# Altium PCB 信号采集板.PcbDoc (part 1 of 4)
Units mil, origin at the board's own origin, x right, y up, seen from the top; angles counter-clockwise.
Board outline 5905.51 x 1775.59 mil, 2 copper layers (Top Layer, Bottom Layer); 203 components, 126 nets, 643 pads, 227 vias.
Unrouted connection lines stored in the file: 2.
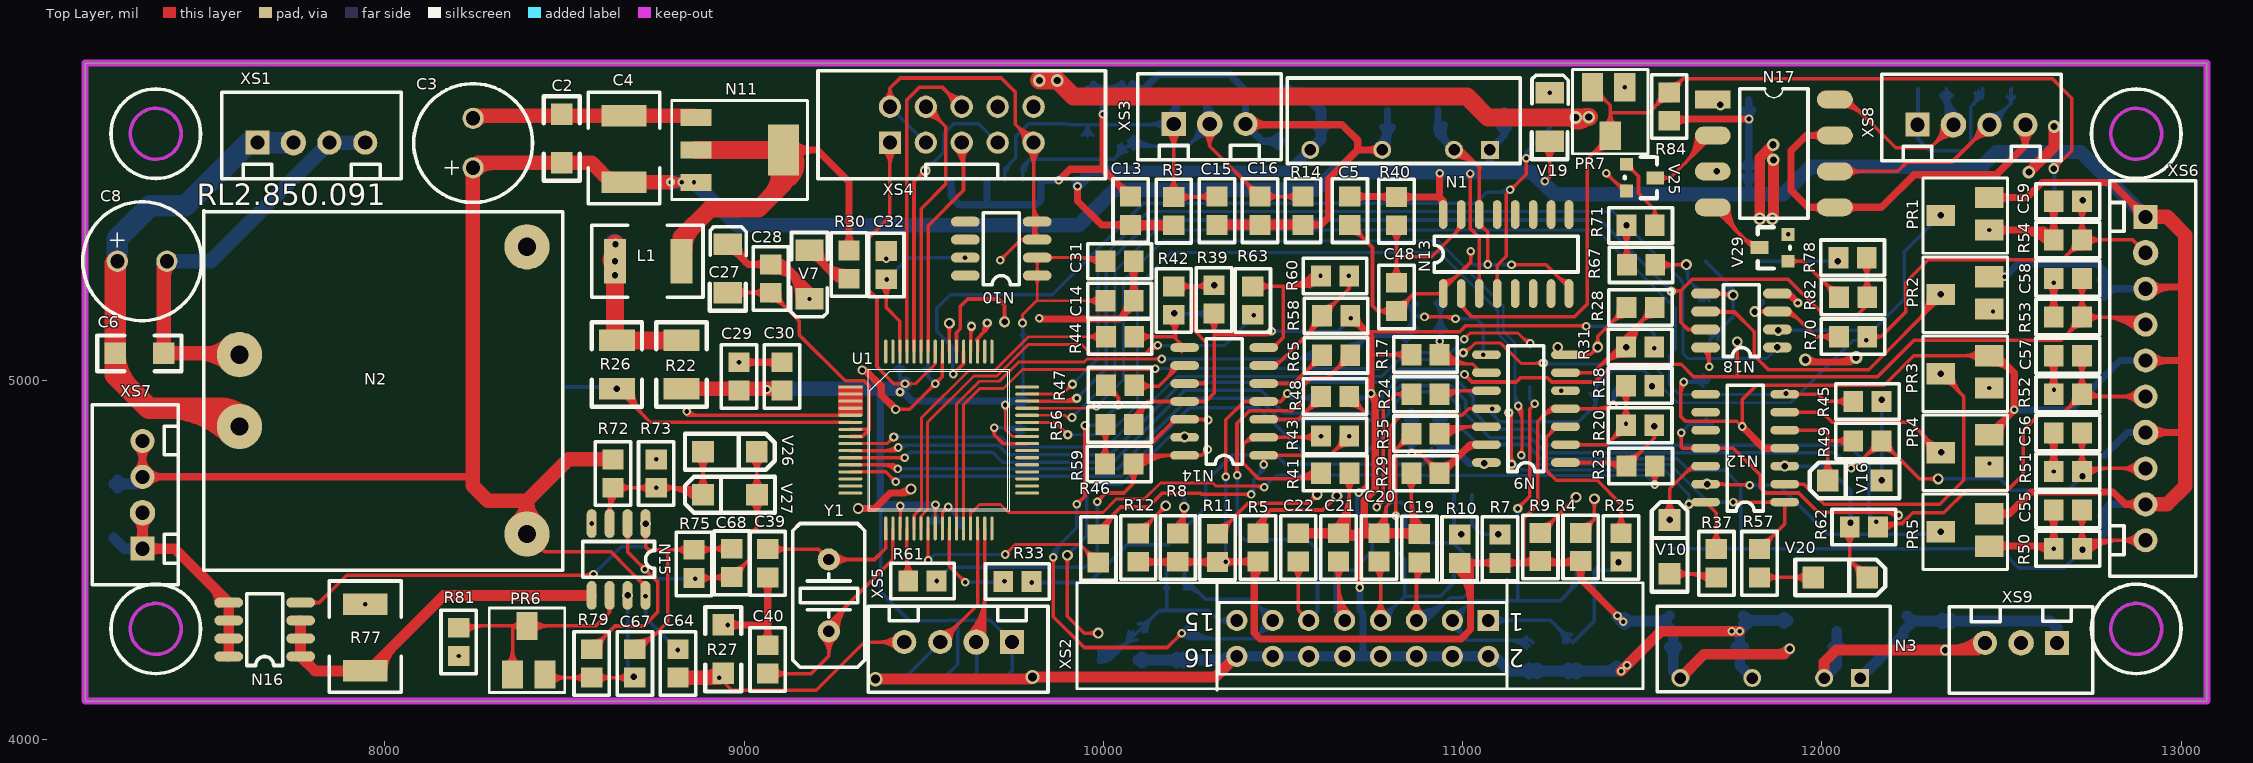
[diagram p0: Top Layer view]
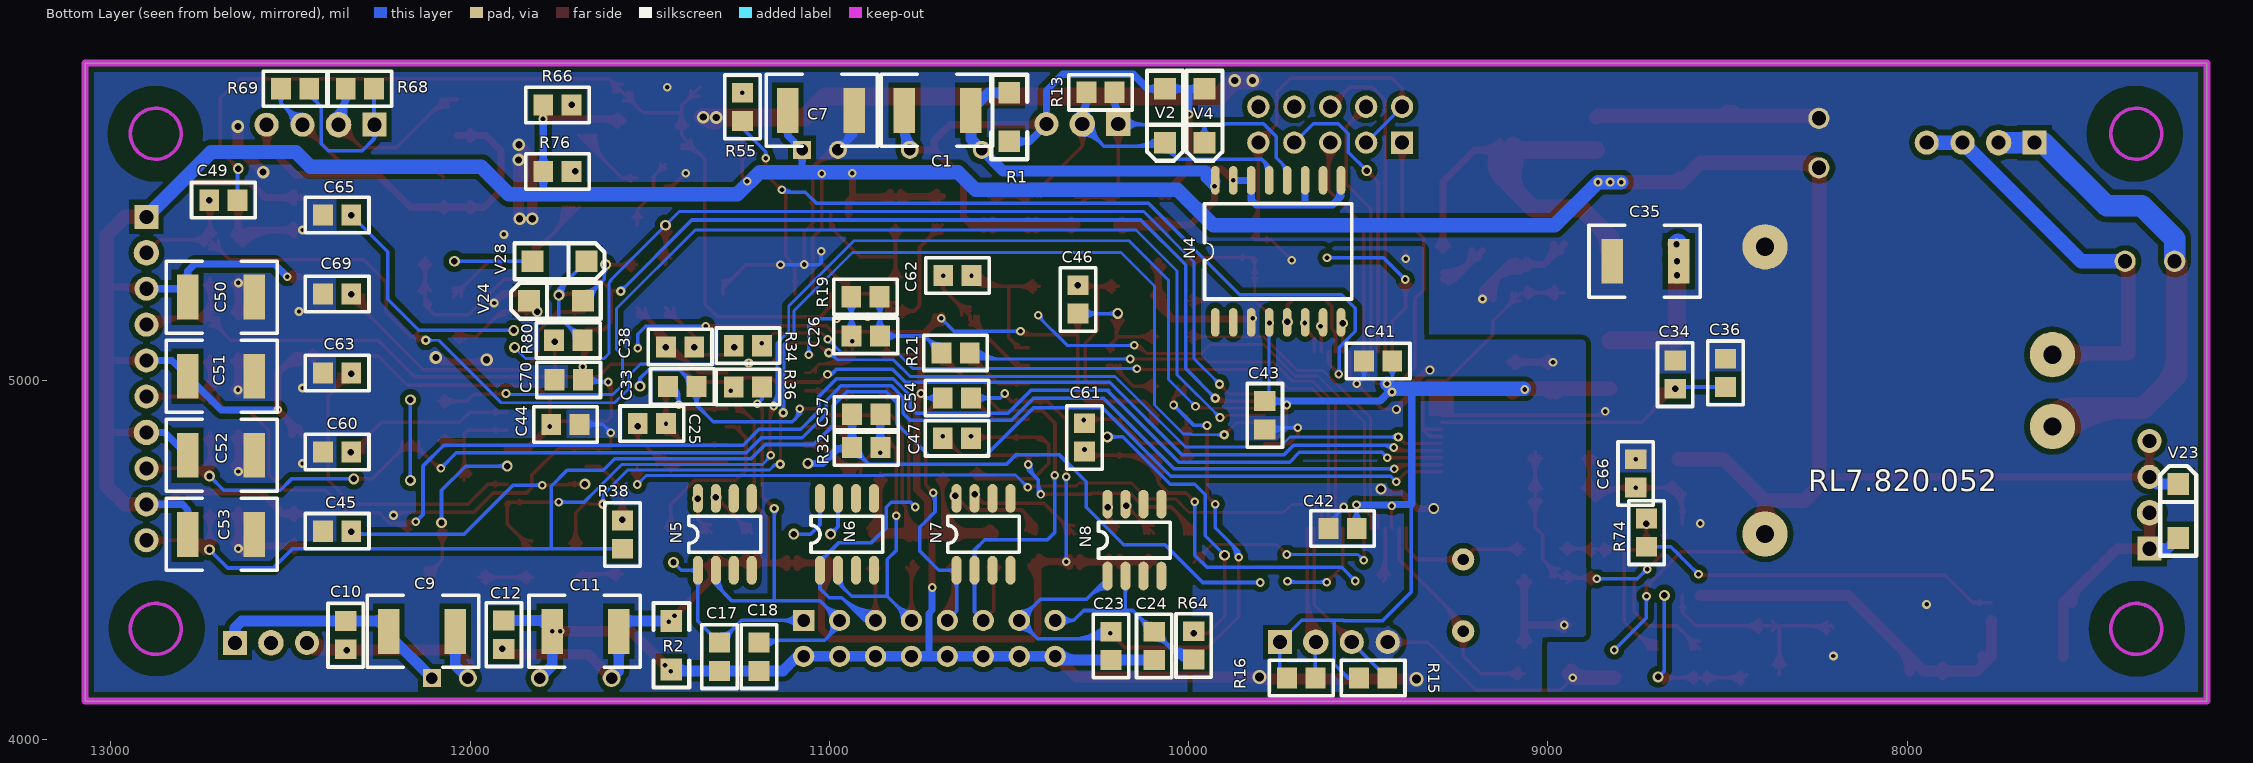
[diagram p1: Bottom Layer view, seen from below]

## Layer stack, top to bottom
Top Layer: signal copper 1.4
Dielectric: dielectric 12.6, FR-4, Dk 4.8
Bottom Layer: signal copper 1.4

## Board outline
7166,5883.65 13071.51,5883.65 13071.51,4108.06 7166,4108.06 7166,5883.65

## Design rules (kind name [scope] priority, off if disabled: settings)
Clearance Clearance_1 [All vs (InPolygon)] p1: gap=15
Clearance [All vs (InPolygon)] p2: gap=10
ComponentClearance [All] p1: gap=0 collisioncheckmode=3 verticalgap=0 showdistances=FALSE
MinimumSolderMaskSliver [All] p1: minsoldermaskwidth=6
PolygonConnect [All] p1: connectstyle=Direct reliefconductorwidth=10 reliefentries=4 polygonreliefangle="90 Angle"
RoutingVias [All] p1: holewidth=18 width=30 viastyle="Through Hole" minholewidth=10 minwidth=10 maxholewidth=35 maxwidth=100
SilkToSilkClearance [All] p1: silktosilkclearance=0
SilkscreenOverComponentPads [All] p1: minsilkscreentomaskgap=0
SolderMaskExpansion [All] p1: expansion=4
Width [All] p1: maxlimit=200 minlimit=8 preferedwidth=10
24 further rules are at their usual default settings.

## Components (designator, comment, footprint, x,y, rotation, side; value= is the part's Value field where it differs from the comment)
C1 "10u" 1812 10606,5752 r0 bottom
C2 "0.1u" 1206 8546,5552 r90 top
C3 "100u/50V" RB3.5-8 8246,5592 r90 top
C4 "10u" 1812 8666,5552 r90 top
C5 "0.1u" 0805 10686,5512 r270 top
C6 "0.1u" 1206 7196,5022 r0 top
C7 "10u" 1812 11116,5752 r180 bottom
C8 "100u/50V" RB3.5-8 7256,5332 r0 top
C9 "22u" 1812 12226,4302 r180 bottom
C10 "0.1u" 0805 12346,4252 r90 bottom
C11 "22u" 1812 11586,4302 r0 bottom
C12 "0.1u" 0805 11906,4332 r270 bottom
C13 "0.1u" 0805 10076,5512 r270 top
C14 "0.1u" 0805 10006,5222 r0 top
C15 "0.1u" 0805 10316,5512 r270 top
C16 "0.1u" 0805 10436,5512 r270 top
C17 "10u" 0805 11306,4192 r90 bottom
C18 "10u" 0805 11196,4192 r90 bottom
C19 "10u" 0805 10879.34,4572.55 r270 top
C20 "10u" 0805 10767.04,4574.99 r270 top
C21 "10u" 0805 10654.73,4574.99 r270 top
C22 "10u" 0805 10542.42,4574.99 r270 top
C23 "10u" 0805 10216,4222 r90 bottom
C24 "10u" 0805 10096,4222 r90 bottom
C25 "0.1u" 0805 11454.66,4880.02 r0 bottom
C26 "0.1u" 0805 10938,5124 r180 bottom
C27 "10u" 1206A 8954.66,5244.44 r90 top
C28 "0.1uF" 0805 9074.66,5244.44 r90 top
C29 "0.1u" 0805 8986,4972 r90 top
C30 "0.01u" 0805 9106,4972 r90 top
C31 "0.1u" 0805 10006,5332 r0 top
C32 "330p" 0805 9396,5282 r90 top
C33 "0.1u" 0805 11448.66,4983.02 r180 bottom
C34 "0.1u" 0805 8646,4977 r90 bottom
C35 "47u" 1812 8636,5332 r0 bottom
C36 "0.01u" 0805 8506,4982 r90 bottom
C37 "0.1u" 0805 10858,4906 r0 bottom
C38 "0.1u" 0805 11454.66,5093.02 r180 bottom
C39 "33pF" 0805 9066,4452 r90 top
C40 "33pF" 0805 9066,4263.26 r270 top
C41 "0.1uF" 0805 9512,5054 r180 bottom
C42 "0.1uF" 0805 9610.96,4588.3 r180 bottom
C43 "0.1uF" 0805 9788.12,4863.89 r90 bottom
C44 "0.1u" 0805 11774,4878 r180 bottom
C45 "104" 0805 12330.33,4580.74 r0 bottom
C46 "0.1u" 0805 10308.28,5265.07 r270 bottom
C47 "0.1u" 0805 10605.68,4839.31 r0 bottom
C48 "0.01u" 0805 10816,5272 r270 top
C49 "100u" 0805 12726,5502 r180 bottom
C50 "100u" 1812 12786,5232 r180 bottom
C51 "100u" 1812 12786,5012 r180 bottom
C52 "100u" 1812 12786,4792 r180 bottom
C53 "100u" 1812 12786,4572 r180 bottom
C54 "0.1u" 0805 10605.68,4951.31 r0 bottom
C55 "22p" 0805 12723.72,4639.42 r180 top
C56 "22p" 0805 12723.72,4854.26 r180 top
C57 "22p" 0805 12723.72,5069.1 r180 top
C58 "22p" 0805 12723.72,5283.93 r180 top
C59 "22p" 0805 12723.72,5498.77 r180 top
C60 "104" 0805 12330.33,4800.74 r0 bottom
C61 "0.1u" 0805 10290,4881 r270 bottom
C62 "0.1u" 0805 10683,5292 r180 bottom
C63 "104" 0805 12330.33,5020.74 r0 bottom
C64 "0.1u" 0805 8816,4252 r270 top
C65 "104" 0805 12330.33,5460.74 r0 bottom
C66 "102" 0805 8756,4702 r90 bottom
C67 "102" 0805 8696,4252 r270 top
C68 "102" 0805 8966,4532 r270 top
C69 "104" 0805 12330.33,5240.74 r0 bottom
C70 "104" 0805 11686,5002 r0 bottom
L1 "220uH" 1812 8826,5332 r180 top
N1 "B0505S" B0505LM 11076,5642 r180 top
N2 "YND5" YND5 7596,4872 r180 top
N3 "B2415S" B0505LM 12106,4172 r180 top
N4 "ADM2485" SOIC-16 9926,5162 r90 bottom locked
N5 "REF200" SO-8 11366,4472 r90 bottom
N6 "REF200" SO-8 11026,4472 r90 bottom
N7 "REF200" SO-8 10646,4472 r90 bottom
N8 "REF200" SO-8 10226,4456 r90 bottom
N9 "TLC2274" SO-14 11286,4772 r180 top
N10 "SP708R" SO-8 9816,5292 r180 top
N11 "BM1117" SOT-223 8866,5732 r180 top
N12 "TLC2274" SO-14 11896,4662 r180 top
N13 "SN54LS123" SO-16 10946,5242 r90 top
N14 "TLC2274" SO-14 10446,4792 r180 top
N15 "TLC2272" SO-8 8726,4602 r270 top
N16 "IRF7470" SO-8 7766,4232 r180 top
N17 "TLP521-2" ILEAD-8 11696,5782 r0 top
N18 "TLC2272" SO-8 11876,5092 r180 top
PR1 "10K" 3296-1 12465.84,5479.09 r270 top
PR2 "10K" 3296-1 12465.84,5259.09 r270 top
PR3 "10K" 3296-1 12465.84,5039.09 r270 top
PR4 "10K" 3296-1 12465.84,4819.09 r270 top
PR5 "10K" 3296-1 12465.84,4599.09 r270 top
PR6 "10K" 3296-1 8416,4182 r180 top
PR7 "10K" 3296-1 11391,5816 r0 top
R1 "240" 1206 10446,5612 r90 bottom
R2 "240" 1206 11386,4142 r90 bottom
R3 "1k" 0805 10196,5432 r90 top
R4 "1K" 0805 11328.57,4497.35 r90 top
R5 "1K" 0805 10430.11,4496.02 r90 top
R7 "1K" 0805 11103.96,4492.55 r90 top
R8 "1K" 0805 10207.18,4495.86 r90 top
R9 "1K" 0805 11216.27,4497.35 r90 top
R10 "1K" 0805 10991.65,4492.55 r90 top
R11 "1K" 0805 10317.8,4494.99 r90 top
R12 "1K" 0805 10097.18,4495.86 r90 top
R13 "180" 0805 10206,5802 r0 bottom
R14 "1k" 0805 10556,5512 r270 top
R15 "10K" 0805 9526,4172 r180 bottom
R16 "10K" 0805 9726,4172 r180 bottom
R17 "10k" 0805 10936,5072 r180 top
R18 "10k" 0805 11454.58,4985.54 r0 top
R19 "10k" 0805 10939,5233 r180 bottom
R20 "10k" 0805 11454.58,4875.54 r0 top
R21 "470" 0805 10688,5077 r180 bottom
R22 "2" 1210 8826,5112 r270 top
R23 "470" 0805 11456,4762 r0 top
R24 "10K" 0805 10936,4962 r180 top
R25 "10k" 0805 11440.88,4574.99 r270 top
R26 "2" 1210 8646,5112 r270 top
R27 "0" 1206 8996,4131 r90 top
R28 "10k" 0805 11534.66,5203.02 r180 top
R29 "10k" 0805 10936,4742 r180 top
R30 "10K" 0805 9292.38,5362 r270 top
R31 "10k" 0805 11454.66,5093.02 r0 top
R32 "10k" 0805 10858,4814 r0 bottom
R33 "470" 0805 9800,4441 r180 top
R34 "470" 0805 11266,5097 r180 bottom
R35 "10K" 0805 10936,4852 r180 top
R36 "10K" 0805 11266,4982 r180 bottom
R37 "1K" 0805 11706,4452 r90 top
R38 "10K" 0805 11576,4532 r90 bottom
R39 "10k" 0805 10308.28,5265.07 r270 top
R40 "47K" 0805 10816,5432 r90 top
R41 "10k" 0805 10606,4742 r0 top
R42 "10k" 0805 10196,5262 r270 top
R43 "10k" 0805 10605.68,4845.31 r0 top
R44 "470" 0805 10086,5122 r180 top
R45 "1K" 0805 12166,4942 r180 top
R46 "470" 0805 9986,4572 r270 top
R47 "10K" 0805 10086,4987 r180 top
R48 "10K" 0805 10605.68,4955.31 r0 top
R49 "10K" 0805 12166,4832 r180 top
R50 "4.7K" 0805 12644.98,4532 r0 top
R51 "4.7K" 0805 12644.98,4746.84 r0 top
R52 "4.7K" 0805 12644.98,4961.68 r0 top
R53 "4.7K" 0805 12644.98,5176.51 r0 top
R54 "4.7K" 0805 12644.98,5391.35 r0 top
R55 "1K" 0805 11242,5801 r270 bottom
R56 "10k" 0805 10006,4878 r0 top
R57 "1K" 0805 11826,4452 r90 top
R58 "10k" 0805 10608.44,5180.19 r0 top
R59 "10k" 0805 10005,4768 r0 top
R60 "10k" 0805 10684.19,5291.06 r180 top
R61 "470" 0805 9536,4442 r180 top
R62 "10K" 0805 12156,4592 r180 top
R63 "470" 0805 10416,5262 r270 top
R64 "10K" 0805 9986,4302 r270 bottom
R65 "10K" 0805 10608.44,5070.19 r0 top
R66 "1K" 0805 11796,5767 r180 bottom
R67 "1K" 0805 11536,5322 r180 top
R68 "1K" 0805 12346,5812 r180 bottom
R69 "1K" 0805 12526,5812 r180 bottom
R70 "10K" 0805 12126,5122 r180 top
R71 "1K" 0805 11456,5432 r0 top
R72 "1K" 0805 8635.61,4701.76 r90 top
R73 "1K" 0805 8755.61,4701.76 r90 top
R74 "100" 0805 8726,4537.2 r90 bottom
R75 "1M" 0805 8861.2,4529.09 r270 top
R76 "1K" 0805 11796,5582 r180 bottom
R77 "1/3W" 1812 7946,4192 r90 top
R78 "1K" 0805 12046,5342 r0 top
R79 "5.1K" 0805 8576,4252 r270 top
R80 "10K" 0805 11766,5112 r180 bottom
R81 "1K" 0805 8206,4312 r270 top
R82 "1K" 0805 12126,5232 r180 top
R84 "1K" 0805 11575,5723 r90 top
U1 "C8051F021" TQFP-64 9296,4982 r0 top
V2 "P6KE5A" 1206-D 10066,5662 r270 bottom
V4 "P6KE5A" 1206-D 9956,5662 r270 bottom
V7 "LED" 1206A 9182.38,5362 r270 top
V10 "4148" 1206-D 11576,4612 r90 top
V16 "4148" 1206-D 12016,4722 r180 top
V19 "LED" 1206a 11242,5666 r90 top
V20 "4148" 1206-D 12126,4452 r0 top
V23 "4148" 1206-D 7246,4712 r90 bottom
V24 "4148" 1206-D 11836,5222 r0 bottom
V25 "2N2222" SOT-23 11456,5602 r270 top
V26 "4148" 1206-D 9035.61,4801.76 r0 top
V27 "4148" 1206-D 8886,4682 r180 top
V28 "4148" 1206-D 11676,5332 r180 bottom
V29 "2N2222" SOT-23 11906,5332 r90 top
XS1 "Header 4" SIP-4 7646,5662 r180 top
XS2 "Header 8X2" HDR2X8 11071.51,4332.47 r180 top
XS3 "Header 3" SIP-3 10196,5714 r180 top
XS4 "HEADER 5X2" IDC-10 9406,5662 r180 top
XS5 "SHT11" SIP-4 9746,4272 r0 top
XS6 "Header 10" SIP-10 12366,4972 r270 top
XS7 "2.54-4" SIP-4 7326,4532 r270 top
XS8 "SHT11" SIP-4 12266,5712 r180 top
XS9 "Header 3" SIP-3 12654,4270 r0 top
Y1 "XTAL" CRY 9236,4502 r0 top

## Footprints (in the part's own frame and the unit in brackets; to place one, negate y for a bottom-side part, rotate by r counter-clockwise, add the part's x,y. Pads: shape width x height; smd on the part's side, far side on the other; paste and mask are expansions set on the pad)
0805 [mm]
  rect 1.4x1.5 smd: 1(0,0) 2(2,0)
  silkscreen extent -1.25,-1.25 3.25,1.25
1206 [mil]
  rect 60x60 smd: 1(53.76,53.48) 2(188.76,53.48)
  silkscreen extent 4,3 239,103
1206-D [mm]
  rect 1.54x1.54 smd: A(-3.81,0) K(0,0)
  silkscreen extent -5.08,-1.27 1.27,1.27
1206A [mil]
  rect 60x78.74 smd: 1(0,0) 2(135,0)
  silkscreen extent -50,-52 184,50
1206a [mil]
  rect 60x78.74 smd: 1(0,0) 2(135,0)
  silkscreen extent -50,-52 184,50
1210 [mil]
  rect 60x100 smd: 1(0,0) 2(135,0)
  silkscreen extent -50,-70 185,70
1812 [mil]
  rect 60x125 smd: 1(0,0) 2(185,0)
  silkscreen extent -60,-100 250,100
3296-1 [mm]
  rect 1.5x2 smd: 1(-0.762,0) 2(1.524,0) W(0.508,-3.429)
  silkscreen extent -2.16,-4.7 3.18,1.27
B0505LM [mil]
  rect 50x50 hole 32: 1(0,0)
  round 50 hole 32: 2(100,0) 3(300,0) 4(500,0)
  silkscreen extent -84,-200 564,38
CRY [mil]
  round 62 hole 31.5: 1(0,0) 2(0,-200)
  silkscreen extent -100,-300 100,100
HDR2X8 [mm] "Connector; Header; 8x2 Position"
  rect 1.5x1.5 hole 0.9: 1(0,0)
  round 1.5 hole 0.9: 2(0,2.54) 3(2.54,0) 4(2.54,2.54) 5(5.08,0) 6(5.08,2.54) 7(7.62,0) 8(7.62,2.54) 9(10.16,0) 10(10.16,2.54) 11(12.7,0) 12(12.7,2.54) 13(15.24,0) 14(15.24,2.54) 15(17.78,0) 16(17.78,2.54)
  silkscreen extent -1.27,-1.27 19.05,3.81
IDC-10 [mil]
  rect 62x62 hole 39.37: 1(0,0)
  round 62 hole 39.37: 2(0,-100) 3(-100,0) 4(-100,-100) 5(-200,0) 6(-200,-100) 7(-300,0) 8(-300,-100) 9(-400,0) 10(-400,-100)
  silkscreen extent -600,-200 200,100
ILEAD-8 [mil]
  rect 100x50 smd: 1(0,0)
  oval 100x50 smd: 2(0,-100) 3(0,-200) 4(0,-300) 5(340,-300) 6(340,-200) 7(340,-100) 8(340,0)
  silkscreen extent 75,-330 265,30
RB3.5-8 [mm]
  round 1.5 hole 1: 1(0,0) 2(3.5,0)
  silkscreen extent -2.45,-4.2 5.95,4.2
SIP-3 [mm]
  rect 1.7x1.7 hole 1: 1(0,0)
  round 1.8 hole 1: 2(-2.54,0)
  round 1.7 hole 1: 3(-5.08,0)
  silkscreen extent -7.6,-3.56 2.54,2.54
SIP-4 [mm]
  rect 1.7x1.7 hole 1: 1(0,0)
  round 1.8 hole 1: 2(-2.54,0)
  round 1.7 hole 1: 3(-5.08,0) 4(-7.62,0)
  silkscreen extent -10.17,-3.56 2.54,2.54
SIP-10 [mm]
  rect 1.7x1.7 hole 1: 1(-12.28,13.58)
  round 1.8 hole 1: 2(-9.74,13.58) 7(2.96,13.58)
  round 1.7 hole 1: 3(-7.2,13.58) 4(-4.66,13.58) 5(-2.12,13.58) 6(0.42,13.58) 8(5.5,13.58) 9(8.04,13.58) 10(10.58,13.58)
  silkscreen extent -14.82,11.04 13.12,17.14
SO-8 [mil]
  oval 80x28 smd: 1(0,0) 2(0,-50) 3(0,-100) 4(0,-150) 5(200,-150) 6(200,-100) 7(200,-50) 8(200,0)
  silkscreen extent 50,-175 150,25
SO-14 [mil]
  oval 80x24 smd: 1(-0.16,0.23) 2(-0.16,-49.77) 3(-0.16,-99.77) 4(-0.16,-149.77) 5(-0.16,-199.77) 6(-0.16,-249.77) 7(-0.16,-299.77) 8(219.84,-299.77) 9(219.84,-249.77) 10(219.84,-199.77) 11(219.84,-149.77) 12(219.84,-99.77) 13(219.84,-49.77) 14(219.84,0.23)
  silkscreen extent 60,-325 160,25
SO-16 [mil]
  oval 80x24 smd: 1(0,0) 2(0,-50) 3(0,-100) 4(0,-150) 5(0,-200) 6(0,-250) 7(0,-300) 8(0,-350) 9(220,-350) 10(220,-300) 11(220,-250) 12(220,-200) 13(220,-150) 14(220,-100) 15(220,-50) 16(220,0)
  silkscreen extent 60,-375 160,25
SOIC-16 [mil]
  oval 80x24 smd: 1(0,0) 2(0,-50) 3(0,-100) 4(0,-150) 5(0,-200) 6(0,-250) 7(0,-300) 8(0,-350) 9(395,-350) 10(395,-300) 11(395,-250) 12(395,-200) 13(395,-150) 14(395,-100) 15(395,-50) 16(395,0)
  silkscreen extent 65,-380 330,30
SOT-23 [mil]
  rect 36x36 smd: 1(0,0) 2(75,0)
  rect 36x50 smd: 3(38,80)
  silkscreen extent -20,-5 95,85
SOT-223 [mm]
  rect 2.2x1.2 smd: 1(0,0) 2(0,2.3) 3(0,4.6)
  rect 2.2x3.6 smd: 4(-6.2,2.3)
  silkscreen extent -7.9,-1.2 1.7,5.8
TQFP-64 [mm]
  rect 1.7x0.22 smd: 1(0,0)
  oval 1.7x0.22 smd: 2(0,-0.5) 3(0,-1) 4(0,-1.5) 5(0,-2) 6(0,-2.5) 7(0,-3) 8(0,-3.5) 9(0,-4) 10(0,-4.5) 11(0,-5) 12(0,-5.5) 13(0,-6) 14(0,-6.5) 15(0,-7) 16(0,-7.5) 33(12.5,-7.5) 34(12.5,-7) 35(12.5,-6.5) 36(12.5,-6) 37(12.5,-5.5) 38(12.5,-5) 39(12.5,-4.5) 40(12.5,-4) 41(12.5,-3.5) 42(12.5,-3) 43(12.5,-2.5) 44(12.5,-2) 45(12.5,-1.5) 46(12.5,-1) 47(12.5,-0.5) 48(12.5,0)
  oval 0.22x1.7 smd: 17(2.5,-10) 18(3,-10) 19(3.5,-10) 20(4,-10) 21(4.5,-10) 22(5,-10) 23(5.5,-10) 24(6,-10) 25(6.5,-10) 26(7,-10) 27(7.5,-10) 28(8,-10) 29(8.5,-10) 30(9,-10) 31(9.5,-10) 32(10,-10) 49(10,2.5) 50(9.5,2.5) 51(9,2.5) 52(8.5,2.5) 53(8,2.5) 54(7.5,2.5) 55(7,2.5) 56(6.5,2.5) 57(6,2.5) 58(5.5,2.5) 59(5,2.5) 60(4.5,2.5) 61(4,2.5) 62(3.5,2.5) 63(3,2.5) 64(2.5,2.5)
  silkscreen extent 1.25,-8.75 11.25,1.25
YND5 [mm]
  round 3.2 hole 1.3: 1(0,0) 2(0,-5.08) 3(-20.32,-12.7) 4(-20.32,7.595)
  silkscreen extent -22.83,-15.27 2.54,10.16

## Part data
C1 C3 C4 C7 C8 C27 C35: library part ELECTRO1, "Electrolytic Capacitor"
C2 C5 C6 C9 C11 C15 C16 C29 C30 C31 C34 C36 C48 C49 C50 C51 C52 C53 C55 C56 C57 C58 C59: library part CAP, "Capacitor"
C10 C12 C13 C14 C17 C18 C19 C20 C21 C22 C23 C24 C25 C26 C32 C33 C37 C38 C44 C45 C46 C47 C54 C60 C61 C62 C63 C64 C65 C66 C67 C68 C69 C70: library part CAP
C28 C39 C40 C41 C42 C43: library part Cap, "Capacitor"
L1: library part L
N1 N2 N3: library part B0505LM
N5 N6 N7 N8: library part EF200
N9 N12 N14: library part LM124
N13: library part 74LS123
N15 N18: library part 1458
N16: library part "MOSFET N"
N17: "Optoisolator"
PR1 PR2 PR3 PR4 PR5 PR6 PR7: library part POT
R1 R2 R13 R15 R16 R22 R26 R27 R30 R37 R38 R40 R45 R49 R50 R51 R52 R53 R54 R55 R57 R62 R66 R67 R68 R69 R70 R71 R72 R73 R74 R75 R76 R77 R78 R79 R80 R81 R82 R84: library part RES2
R3 R4 R5 R7 R8 R9 R10 R11 R12 R14 R17 R18 R19 R20 R21 R23 R24 R25 R28 R29 R31 R32 R33 R34 R35 R36 R39 R41 R42 R43 R44 R46 R47 R48 R56 R58 R59 R60 R61 R63 R64 R65: library part R
V2 V4 V10 V16 V20 V23 V24 V26 V27 V28: library part DIODE
V25 V29: library part NPN, "NPN Transistor"
XS1: "Header, 4-Pin"
XS2: "Header, 8-Pin, Dual row"
XS3 XS9: "Header, 3-Pin"
XS5 XS8: library part "Header 4", "Header, 4-Pin"
XS6: "Header, 10-Pin"
XS7: library part CON4
Y1: "Crystal Oscillator"

## Via types
v1: diameter 24, hole 13, Top Layer to Bottom Layer, 112 vias
v2: diameter 30, hole 18, Top Layer to Bottom Layer, 58 vias
v3: diameter 25, hole 12, Top Layer to Bottom Layer, 22 vias
v4: diameter 26, hole 13, Top Layer to Bottom Layer, 17 vias
v5: diameter 35, hole 20, Top Layer to Bottom Layer, 12 vias
v6: diameter 40, hole 25, Top Layer to Bottom Layer, 2 vias
v7: diameter 30, hole 20, Top Layer to Bottom Layer, 2 vias
v8: diameter 25, hole 15, Top Layer to Bottom Layer, 2 vias

## Nets (pads, with @x,y where several pads share a name; then routed paths per layer and width w, separated by ;. In a path a pad name is that pad's centre, name@x,y a point inside that pad or via, vN(x,y) a via of type N, cw(c..) or ccw(c..) an arc to the next point about the centre after c; other vN are vias at no path point)
3.3K1: C23.2 N8.1 R47.2 XS2.13 | length 2868.7
  Top Layer w10: v1@9856.05,4503.05 cw(c9844.1,4491.1) 9861,4491.1 cw(c9877.9,4491.1) v1@9865.95,4503.05 ; v1(9861,4508) 9861,4343 9947,4257 10178,4257 v1(10218,4297) ; v1@9926,4663 ccw(c9926,4682.31) 9939.66,4668.66 ; v1@9931,4660 9949,4678 v1(9949,4875) ; v1@9933,4656 cw(c9947.49,4656) 9937.24,4666.24 ; v1@9944.05,4870.05 cw(c9932.1,4858.1) 9949,4858.1 cw(c9965.9,4858.1) v1@9953.95,4870.05 ; R47.2@10007.26,4987 10042,4952.26 v1(10042,4932) ; R47.2@10008.79,4972.57 cw(c10011.67,4948.98) R47.2@10028.48,4965.78 ; R47.2@10010,4962.64 cw(c10014.84,4923.13) 10042.98,4951.28 cw(c10074.83,4983.12) R47.2@10029.81,4984.39 ; v1@10037.05,4936.95 ccw(c10025.1,4948.9) 10042,4948.9 ccw(c10058.9,4948.9) v1@10046.95,4936.95 ; v1@10211,4297 cw(c10194.1,4297) 10206.05,4285.05 cw(c10218,4273.1) v1@10218,4290
  Bottom Layer w10: v1@9856.05,4512.95 ccw(c9844.1,4524.9) 9861,4524.9 ccw(c9877.9,4524.9) v1@9865.95,4512.95 ; v1@9858,4508 cw(c9891.8,4508) 9867.9,4531.9 ; v1(9861,4508) 9861,4525 9926,4590 v1(9926,4656) ; v1@9868,4508 cw(c9925.94,4508) 9884.97,4548.97 ; v1@9921.05,4651.05 cw(c9909.1,4639.1) 9926,4639.1 cw(c9942.9,4639.1) v1@9930.95,4651.05 ; v1(9949,4875) 9985,4875 v1(10042,4932) ; v1@9953.95,4870.05 cw(c9965.9,4858.1) 9965.9,4875 cw(c9965.9,4891.9) v1@9953.95,4879.95 ; v1@10035,4932 cw(c10018.1,4932) 10030.05,4920.05 cw(c10042,4908.1) v1@10042,4925 ; C23.2@10212.71,4295.48 ccw(c10246.96,4329.73) 10246.96,4281.29 ; C23.2@10216,4300.74 10235.45,4281.29 10420.33,4281.29 XS2.13@10471.51,4332.47 10412.46,4391.53 10284.11,4391.53 10226,4449.64 N8.1@10226,4482 ; C23.2@10218,4290 cw(c10218,4268.9) C23.2@10232.92,4283.82 ; C23.2@10219.78,4302.55 ccw(c10271.1,4353.87) 10271.1,4281.29 ; C23.2@10225,4297 ccw(c10237.7,4297) C23.2@10228.72,4288.02 ; N8.1@10226,4421 cw(c10226,4351.86) 10274.89,4400.75 ; N8.1@10226,4431 cw(c10226,4386) 10257.82,4417.82 ; N8.1@10226,4441 cw(c10226,4420.15) 10240.75,4434.89 ; C23.2@10226.85,4309.62 ccw(c10295.24,4378.01) 10295.24,4281.29 ; C23.2@10233.92,4316.69 ccw(c10319.38,4402.16) 10319.38,4281.29 ; XS2.13@10471.51,4307.94 ccw(c10471.51,4248.73) 10429.64,4290.6 ccw(c10387.77,4332.47) 10446.98,4332.47 ccw(c10387.77,4332.47) 10429.64,4374.34 ccw(c10471.51,4416.21) XS2.13@10471.51,4357 ; XS2.13@10471.51,4317.94 ccw(c10471.51,4282.87) 10446.71,4307.67 ccw(c10421.91,4332.47) 10456.98,4332.47 ccw(c10421.91,4332.47) 10446.71,4357.27 ccw(c10471.51,4382.07) XS2.13@10471.51,4347
3.3K2: C24.2 N8.2 R64.2 XS2.15 | length 1247.5
  Bottom Layer w10: R64.2@9986,4223.26 10018.52,4223.26 C24.2@10096,4300.74 10155.29,4360.03 10181.75,4360.03 ; R64.2@9987.97,4215.82 ccw(c9987.97,4271.61) 10027.42,4232.16 ; R64.2@9987.97,4225.82 ccw(c9987.97,4305.75) 10044.49,4249.23 ; R64.2@9987.97,4235.82 ccw(c9987.97,4339.9) 10061.56,4266.3 ; R64.2@9987.97,4245.82 ccw(c9987.97,4374.04) C24.2@10078.63,4283.37 ; 10054.13,4258.87 ccw(c10012.26,4300.74) C24.2@10071.47,4300.74 ; 10058.88,4263.62 cw(c10094.03,4228.47) C24.2@10094.03,4278.18 ; C24.2@10071.2,4275.94 ccw(c10046.4,4300.74) C24.2@10081.47,4300.74 ; C24.2@10097.97,4323.3 ccw(c10097.97,4373.01) 10133.12,4337.86 ; C24.2@10110.53,4300.74 cw(c10145.6,4300.74) C24.2@10120.8,4325.54 ; C24.2@10120.53,4300.74 cw(c10179.74,4300.74) 10137.87,4342.61 ; N8.2@10169.64,4423.64 cw(c10154.27,4408.27) 10176,4408.27 cw(c10197.73,4408.27) N8.2@10182.36,4423.64 ; N8.2@10176,4482 10176,4472 10176,4365.78 10181.75,4360.03 ; XS2.15@10352.58,4316.88 ccw(c10319.55,4289.69) 10319.55,4332.47 ; XS2.15@10352.58,4348.06 cw(c10319.55,4375.26) 10319.55,4332.47 ; XS2.15@10360.3,4323.24 ccw(c10340.73,4307.13) 10340.73,4332.47 ccw(c10340.73,4357.81) XS2.15@10360.3,4341.71 ; XS2.15@10371.51,4332.47 10319.54,4332.47 ; 10181.75,4360.03 10291.98,4360.03 10319.54,4332.47
3.3V: C35.1 L1.2 R22.1 R26.1 | length 639.5
  Top Layer w50: L1.2@8642.38,5356.09 L1.2@8641,5354.72 ; v2(8642.38,5379.72) 8641,5381.09 L1.2@8641,5354.72 ; R22.1@8826,5112 R26.1@8646,5112 8641,5117 v2(8641,5332) ; L1.2@8631,5332 cw(c8661.7,5332) L1.2@8639.99,5353.71 ; L1.2@8631,5332 cw(c8661.7,5332) L1.2@8639.99,5353.71 ; L1.2@8631,5332 cw(c8661.7,5332) L1.2@8639.99,5353.71 ; v2(8641,5332) L1.2@8641,5354.72 ; v2(8641,5332) 8641,5344.72 8636,5349.72 L1.2@8641,5354.72
  Bottom Layer w50: C35.1@8638.44,5383.65 v2(8642.38,5379.72) ; v2(8641,5293.1) 8641,5294.48 8634.5,5300.98 8636,5302.47 C35.1@8636,5332 8636,5349.72 8641,5344.72 v2(8641,5332)
24V: C6.1 C8.1 C9.1 C10.2 N2.1 N3.1 XS1.1 XS1.2 XS9.1 | length 2651.7
  Top Layer w60: C8.1@7256,5332 7249.76,5325.76 C6.1@7249.76,5075.48 ; 7291.51,4974.68 cw(c7392.31,5075.48) C6.1@7249.76,5075.48 ; 7393.17,4923.02 cw(c7393.17,4669.17) N2.1@7572.67,4848.67 ; 7538.02,4923.02 cw(c7538.02,4814.02) N2.1@7615.1,4891.1 ; N2.1@7596,4872 7544.98,4923.02 7343.17,4923.02 7249.76,5016.43 C6.1@7249.76,5075.48
  Bottom Layer w30: N3.1@12106,4172 12226,4292 C9.1@12226,4302 12254.74,4330.74 C10.2@12346,4330.74 12635.26,4330.74 12654,4312 ; C9.1@12236.61,4345.11 ccw(c12271.29,4379.79) 12271.29,4330.74 ; C10.2@12335.15,4321.86 ccw(c12313.71,4300.42) 12313.71,4330.74 ccw(c12313.71,4361.06) C10.2@12335.15,4339.62 ; C10.2@12356.85,4321.86 cw(c12378.29,4300.42) 12378.29,4330.74 cw(c12378.29,4361.06) C10.2@12356.85,4339.62 ; XS9.1@12641.52,4283.61 ccw(c12615.47,4312) 12654,4312 ; XS9.1@12654,4270 12654,4312 ; XS9.1@12666.48,4283.61 cw(c12692.53,4312) 12654,4312
  Bottom Layer w60: C8.1@7256,5332 7256,5394.91 7347.1,5486.02 7445.53,5486.02 7621.51,5662 XS1.1@7646,5662 XS1.2@7746,5662
24VGND: C6.2 C8.2 C9.2 C10.1 N2.2 N3.2 XS1.3 XS1.4 XS9.3 | length 2172
  Top Layer w30: N3.2@12006,4172 12006,4215.78 12040.02,4249.8 12326,4249.8 v2(12343.17,4249.8) 12433.8,4249.8 XS9.3@12454,4270 ; 12360.64,4249.8 ccw(c12360.64,4363.36) XS9.3@12440.94,4283.06
  Top Layer w40: 7384.76,5287.18 cw(c7438.62,5287.18) C8.2@7400.53,5325.26 ; C8.2@7393.8,5332 7384.76,5322.96 C6.2@7384.76,5075.48 7592.52,5075.48 N2.2@7596,5072 ; 7483.81,5075.48 cw(c7483.81,4959.81) N2.2@7565.6,5041.6 ; 7500.61,5075.48 ccw(c7500.61,5167.39) N2.2@7565.6,5102.4
  Bottom Layer w30: N3.2@12006,4172 12041,4207 C9.2@12041,4302 ; C9.2@12030.39,4258.89 cw(c12004.79,4233.29) 12041,4233.29 cw(c12077.21,4233.29) C9.2@12051.61,4258.89
  Bottom Layer w40: C8.2@7393.8,5332 7516,5332 XS1.3@7846,5662 XS1.4@7946,5662
+5V: C2.1 C3.1 C4.1 C5.1 C7.1 C44.1 C50.1 C51.1 C52.1 C53.1 C64.1 C70.1 N1.1 N2.4 N11.3 N12.4 N13.3 N13.16 N15.8 N18.8 PR1.1 PR2.1 PR3.1 PR4.1 PR5.1 R40.2 R66.1 R72.2 R76.1 R84.1 V19.1 V23.K XS6.1 XS6.3 XS6.5 XS6.7 XS6.9 XS7.3 XS7.4 | length 17664.7
  Top Layer w10: N2.4@8396,4573 8445,4524 8629,4524 8682,4471 8726,4427 N15.8@8726,4402 ; 8708.93,4444.07 ccw(c8726,4461.14) N15.8@8726,4437 ; 8711.34,4441.66 cw(c8697.69,4428) N15.8@8717,4428 ; N15.8@8721.05,4404.95 ccw(c8709.1,4416.9) 8726,4416.9 ccw(c8742.9,4416.9) N15.8@8730.95,4404.95 ; v1@11016.05,5571.05 cw(c11004.1,5559.1) 11021,5559.1 cw(c11037.9,5559.1) v1@11025.95,5571.05 ; v1(11021,5576) 11021,5423 11046,5398 N13.3@11046,5242 ; N13.3@11041.05,5274.95 ccw(c11029.1,5286.9) 11046,5286.9 ccw(c11062.9,5286.9) N13.3@11050.95,5274.95 ; V19.1@11224.32,5648.32 cw(c11181.64,5605.64) 11242,5605.64 cw(c11302.36,5605.64) V19.1@11259.68,5648.32 ; v1(11229,5555) 11242,5568 V19.1@11242,5666 ; V19.1@11231.39,5655.39 cw(c11205.79,5629.79) 11242,5629.79 cw(c11278.21,5629.79) V19.1@11252.61,5655.39 ; 11607,4959.79 cw(c11651.21,4959.79) v1@11619.95,4991.05 ; 11607,4983.93 cw(c11627.07,4983.93) v1@11612.88,4998.12 ; v1(11615,4996) 11607,4988 11607,4900 11620,4887 11763,4887 v1(11778,4872) 11778,4947 11818,4987 12173,4987 12255.09,5069.09 PR3.1@12465.84,5069.09 ; N18.8@11669.64,5085.64 cw(c11630.13,5046.13) v1@11686,5046.13 ; N18.8@11676,5092 11686,5082 v1(11686,5038) ; N18.8@11676.71,5092.71 cw(c11654.27,5070.27) 11686,5070.27 ; v1@11681.05,5042.95 ccw(c11669.1,5054.9) 11686,5054.9 ccw(c11702.9,5054.9) v1@11690.95,5042.95 ; v1@11773.05,4876.95 ccw(c11761.1,4888.9) 11778,4888.9 ccw(c11794.9,4888.9) v1@11782.95,4876.95 ; PR3.1@12438.66,5051.74 ccw(c12396.79,5009.87) 12396.79,5069.09 ccw(c12396.79,5128.3) PR3.1@12438.66,5086.43 ; PR3.1@12445.73,5058.81 ccw(c12420.93,5034.01) 12420.93,5069.09 ccw(c12420.93,5104.16) PR3.1@12445.73,5079.36
  Top Layer w20: XS7.3@7309.41,4748.59 ccw(c7269.35,4788.65) 7326,4788.65 ccw(c7382.65,4788.65) 7342.59,4748.59 ccw(c7382.65,4788.65) 7382.65,4732 ccw(c7382.65,4675.35) XS7.3@7342.59,4715.41 ; XS7.4@7309.41,4815.41 cw(c7269.35,4775.35) 7326,4775.35 cw(c7382.65,4775.35) XS7.4@7342.59,4815.41 ; XS7.4@7326,4832 XS7.3@7326,4732 8244,4732 8245,4731 ; v1(8726,4400) N15.8@8726,4402 ; C5.1@10686,5512 10814.74,5512 R40.2@10816,5510.74 10935.26,5510.74 ; C5.1@10700.38,5499.58 cw(c10730.36,5469.61) 10730.36,5512 cw(c10730.36,5554.39) C5.1@10700.38,5524.42 ; 10768.6,5512 cw(c10768.6,5465.31) R40.2@10801.62,5498.32 ; 10774.68,5512 ccw(c10774.68,5550.09) R40.2@10801.62,5523.16 ; R40.2@10830.38,5498.32 cw(c10860.36,5468.35) 10860.36,5510.74 cw(c10860.36,5553.13) R40.2@10830.38,5523.16 ; 10935.51,5510.49 cw(c10915.03,5490) N13.16@10944,5490 ; v1(10936,5577) 10935.26,5576.26 10935.26,5510.74 ; N13.16@10946,5462 10946,5500 10935.26,5510.74 ; N1.1@11076,5639 N1.1@11076,5642 ; R84.1@11575,5723 11580,5728 v1(11797,5728) ; R84.1@11589.38,5710.58 cw(c11631.43,5668.54) 11631.43,5728 ; R84.1@11589.38,5735.42 ccw(c11607.29,5753.32) 11607.29,5728 ; v1(11778,4872) 11838.23,4811.77 N12.4@11896.16,4811.77 ; PR5.1@12465.84,4629.09 12521.09,4629.09 ; PR4.1@12465.84,4849.09 v1(12535,4918.24) 12535,5021 12486.91,5069.09 PR3.1@12465.84,5069.09 ; PR2.1@12465.84,5289.09 v1(12508.91,5289.09) ; PR1.1@12465.84,5509.09 12570.09,5509.09 12612,5551 12805.11,5551 XS6.1@12900.65,5455.46 ; PR4.1@12475.69,4868.61 ccw(c12475.69,4892) PR4.1@12492.22,4875.46 ; PR3.1@12475.69,5049.56 cw(c12475.69,4975.31) 12528.19,5027.81 ; PR1.1@12489.49,5495.28 cw(c12522.83,5461.94) 12522.83,5509.09 cw(c12522.83,5556.23) PR1.1@12489.49,5522.89 ; PR5.1@12489.86,4615.66 cw(c12521.08,4586.08) 12521.08,4629.09 ; PR5.1@12489.86,4642.52 ccw(c12521.08,4672.1) 12521.08,4629.09 ; PR2.1@12492.75,5279.59 cw(c12508.91,5270.58) v1(12508.91,5289.09) ; PR2.1@12492.75,5298.59 ccw(c12508.91,5307.59) v1(12508.91,5289.09) ; PR4.1@12495.21,4849.09 cw(c12566.12,4849.09) 12515.98,4899.22 ; XS6.1@12877.18,5455.46 ccw(c12820.53,5455.46) 12860.59,5495.52 ccw(c12900.65,5535.58) XS6.1@12900.65,5478.93 ; XS6.9@12883.94,4638.99 ccw(c12844.54,4600.12) 12844.54,4655.46 ; XS6.9@12883.94,4671.94 cw(c12844.54,4710.81) 12844.54,4655.46 ; XS6.9@12900.65,4655.46 12844.54,4655.46 ; XS6.7@12900.65,4855.46 13002.54,4855.46 13011,4847 ; XS6.5@12900.65,5055.46 13010.46,5055.46 ; XS6.3@12900.65,5255.46 12905.18,5260 13011,5260 ; XS6.5@12917.24,5038.87 cw(c12957.29,4998.82) 12957.29,5055.46 cw(c12957.29,5112.11) XS6.5@12917.24,5072.06 ; XS6.3@12917.24,5238.87 cw(c12968.24,5187.87) 12968.24,5260 ; XS6.3@12917.24,5272.06 ccw(c12946.34,5301.16) 12946.34,5260 ; XS6.7@12918.63,4837.48 cw(c12962.05,4794.06) 12962.05,4855.46 cw(c12962.05,4916.87) XS6.7@12918.63,4873.45 ; 12521.09,4629.09 12582,4690 12810,4690 12844.54,4655.46
  Top Layer w30: v3(8796,5552) v3(8827,5552)
  Top Layer w40: C3.1@8252.74,5585.26 cw(c8302.21,5535.79) 8302.21,5605.76 ; N2.4@8368.42,4605.98 ccw(c8319.07,4665) 8396,4665 ; N2.4@8396,4573 8396,4665 ; N2.4@8423.58,4605.98 cw(c8472.93,4665) 8396,4665 ; C4.1@8610.04,5571.72 ccw(c8633.5,5595.18) C4.1@8633.5,5562 ; R72.2@8635.61,4780.5 8511.5,4780.5 8396,4665 ; v3(8796,5552) C4.1@8666,5552 8629.76,5552 8576,5605.76 C2.1@8492.52,5605.76 8259.76,5605.76 C3.1@8246,5592 8245,5591 8245,4731 8245,4707 8287,4665 8396,4665 ; XS6.9@12900.65,4655.46 12960.46,4655.46 13011,4706 13011,4847 13011,5260 13011,5405 12960.54,5455.46 XS6.1@12900.65,5455.46
  Bottom Layer w10: v1@8721.05,4395.05 cw(c8709.1,4383.1) 8726,4383.1 cw(c8742.9,4383.1) v1@8730.95,4395.05 ; v1(8726,4400) 8726,4340 v1(8816,4250) ; v1@8809,4250 ccw(c8792.1,4250) 8804.05,4261.95 ccw(c8816,4273.9) v1@8816,4257 ; v1(11021,5576) v1@11022,5577 ; v1(11615,4996) 11680,4996 C70.1@11686,5002 ; v1@11619.95,4991.05 cw(c11631.9,4979.1) 11631.9,4996 cw(c11631.9,5012.9) v1@11619.95,5000.95 ; v1@11621.8,4996 ccw(c11621.8,5064.23) C70.1@11670.05,5015.98 ; 11641.27,4996 cw(c11641.27,4955.3) C70.1@11670.05,4984.08 ; 11645.95,4996 ccw(c11645.95,5040.08) C70.1@11677.12,5008.91
  Bottom Layer w20: N1.1@11065.39,5631.39 cw(c11039.79,5605.79) 11076,5605.79 cw(c11112.21,5605.79) N1.1@11086.61,5631.39 ; 11071,5580 11076,5585 N1.1@11076,5642 11116,5682 ; C7.1@11104.86,5702.89 cw(c11090.85,5682) 11116,5682 ; C7.1@11116,5752 11116,5682 ; C7.1@11127.14,5702.89 ccw(c11141.15,5682) 11116,5682 ; C44.1@11775,4872 v1(11778,4872) ; R76.1@11783.58,5567.62 cw(c11753.61,5537.64) 11796,5537.64 cw(c11838.39,5537.64) R76.1@11808.42,5567.62 ; R76.1@11783.58,5596.38 ccw(c11753.61,5626.36) 11796,5626.36 ccw(c11838.39,5626.36) R76.1@11808.42,5596.38 ; R66.1@11783.58,5752.62 cw(c11753.61,5722.64) 11796,5722.64 cw(c11838.39,5722.64) R66.1@11808.42,5752.62 ; R66.1@11796,5782 R76.1@11796,5582 11796,5520 11798,5518 ; v1(12508.91,5289.09) 12543.83,5324 12766,5324 12786,5304 ; v1(12535,4918.24) 12692.24,4918.24 C51.1@12786,5012 12829.46,5055.46 XS6.5@12900.65,5055.46 ; C50.1@12774.16,5280.62 ccw(c12757,5304) 12786,5304 ; C53.1@12775.24,4621.36 ccw(c12762.7,4641) 12786,4641 ; C53.1@12786,4572 12786,4641 ; C52.1@12786,4792 12849.46,4855.46 XS6.7@12900.65,4855.46 ; C53.1@12796.76,4621.36 cw(c12809.3,4641) 12786,4641 ; C50.1@12797.84,5280.62 cw(c12815,5304) 12786,5304 ; XS6.9@12900.65,4655.46 12800.46,4655.46 12786,4641 ; XS6.3@12900.65,5255.46 12809.46,5255.46 C50.1@12786,5232 12786,5304
  Bottom Layer w30: V23.K@7246,4712 7306,4712 XS7.3@7326,4732 ; V23.K@7256.83,4701.17 cw(c7282.97,4675.03) 7282.97,4712 cw(c7282.97,4748.97) V23.K@7256.83,4722.83
  Bottom Layer w40: v3(8796,5552) v3(8827,5552) v3(8861,5552) 8981,5432 9932,5432 10031,5531 10593,5531 10642,5580 11021,5580 11071,5580 11173,5580 ; 11150,5580 11173,5580 ; XS6.1@12900.65,5455.46 12720.11,5636 12485,5636 12444,5595 11969,5595 11892,5518 11798,5518 11256,5518 11194,5580 11173,5580
+5VISO2: C1.1 C13.2 N1.4 N4.16 R1.2 R3.1 | length 1570.3
  Top Layer w20: v1(9928,5541) 9928,5500 9994.74,5433.26 C13.2@10076,5433.26 ; C13.2@10061.62,5420.84 ccw(c10031.64,5390.87) 10031.64,5433.26 ccw(c10031.64,5475.65) C13.2@10061.62,5445.68
  Top Layer w30: C13.2@10076,5433.26 10077.26,5432 R3.1@10196,5432 ; C13.2@10086.85,5442.14 ccw(c10111.33,5466.62) 10111.33,5432 ; R3.1@10185.15,5423.12 ccw(c10163.71,5401.68) 10163.71,5432 ccw(c10163.71,5462.32) R3.1@10185.15,5440.88
  Bottom Layer w30: N4.16@9926,5554 ccw(c9926,5590.21) 9951.61,5564.61 ; v1(9928,5541) 9935,5548 9952,5565 9952,5583 10517,5583 N1.4@10576,5642 10606,5672 C1.1@10606,5752 10557.24,5800.76 R1.2@10499.48,5800.76 ; R1.2@10510.09,5790.15 cw(c10535.69,5764.54) 10535.69,5800.76 cw(c10535.69,5836.97) R1.2@10510.09,5811.36 ; C1.1@10595.39,5708.89 cw(c10569.79,5683.29) 10606,5683.29 cw(c10642.21,5683.29) C1.1@10616.61,5708.89
+15VISO1: C11.1 C12.2 C33.1 C54.1 N3.4 N9.4 N14.4 R2.2 R4.1 R5.1 R7.1 R8.1 R9.1 R10.1 R11.1 R12.1 | length 6027
  Top Layer w10: v1@10336.05,4736.95 ccw(c10324.1,4748.9) 10341,4748.9 ccw(c10357.9,4748.9) v1@10345.95,4736.95 ; v1(10341,4732) 10341,4809 ; 10341,4781 10341,4809 ; N14.4@10413.21,4936.82 ccw(c10401.26,4924.87) 10401.26,4941.77 ccw(c10401.26,4958.67) N14.4@10413.21,4946.72 ; N14.4@10479.11,4936.82 cw(c10491.06,4924.87) 10491.06,4941.77 cw(c10491.06,4958.67) N14.4@10479.11,4946.72 ; 10497.22,4945.22 ccw(c10478.44,4964) v1@10505,4964 ; v1(10512,4964) 10512,4960 10493.77,4941.77 N14.4@10446.16,4941.77 10391.77,4941.77 10341,4891 10341,4809 ; 11170,4493.55 11170,4616 11209,4655 11209,4887 11243.77,4921.77 ; 11221.64,4899.64 cw(c11258.16,4863.12) N9.4@11258.16,4914.77 ; 11236.57,4914.57 cw(c11246.22,4904.92) N9.4@11254.12,4916.06 ; 11238.71,4916.71 cw(c11258.16,4897.26) N9.4@11258.16,4924.77 ; 11244.95,4922.95 cw(c11253.17,4914.73) N9.4@11259.9,4924.22 ; N9.4@11286.16,4921.77 11407.77,4921.77 v1(11419,4933) ; N9.4@11319.11,4916.82 cw(c11331.06,4904.87) 11331.06,4921.77 cw(c11331.06,4938.67) N9.4@11319.11,4926.72 ; 11374.99,4921.77 ccw(c11374.99,4977.01) v1@11414.05,4937.95 ; 11399.13,4921.77 ccw(c11399.13,4952.87) v1@11421.12,4930.88
  Top Layer w20: R12.1@10097.18,4495.86 10098.05,4494.99 R11.1@10317.8,4494.99 10318.83,4496.02 R5.1@10430.11,4496.02 10420,4485.9 10420,4297 10436,4281 10996,4281 11022,4307 11022,4462.2 11022,4486.55 11028,4492.55 ; R12.1@10111.57,4483.44 cw(c10139.45,4455.56) 10139.45,4494.99 ; R12.1@10111.57,4508.27 ccw(c10143.63,4540.34) 10143.63,4494.99 ; 10160.73,4494.99 ccw(c10160.73,4540.34) R8.1@10192.8,4508.27 ; 10164.91,4494.99 cw(c10164.91,4455.56) R8.1@10192.8,4483.44 ; R8.1@10221.57,4483.44 cw(c10249.45,4455.56) 10249.45,4494.99 ; R8.1@10221.57,4508.27 ccw(c10253.63,4540.34) 10253.63,4494.99 ; R11.1@10303.42,4482.58 ccw(c10273.44,4452.6) 10273.44,4494.99 ccw(c10273.44,4537.38) R11.1@10303.42,4507.41 ; R11.1@10332.19,4482.58 cw(c10364.64,4450.13) 10364.64,4496.02 ; R11.1@10332.19,4507.41 ccw(c10359.69,4534.91) 10359.69,4496.02 ; R5.1@10415.73,4483.6 ccw(c10385.75,4453.62) 10385.75,4496.02 ccw(c10385.75,4538.41) R5.1@10415.73,4508.43 ; 10420,4433.96 cw(c10490.2,4433.96) R5.1@10440.56,4483.6 ; R10.1@10981.2,4480.14 cw(c10882.71,4381.64) 11022,4381.64 ; R10.1@10995.34,4494.28 cw(c10930.99,4429.93) 11022,4429.93 ; R10.1@11006.03,4480.14 cw(c11036.01,4450.16) 11036.01,4492.55 cw(c11036.01,4534.94) R10.1@11006.03,4504.97 ; R10.1@11007.84,4482.26 cw(c11028,4467.67) 11028,4492.55 ; R10.1@11007.84,4502.84 ccw(c11028,4517.43) 11028,4492.55 ; R7.1@11089.57,4480.14 ccw(c11059.6,4450.16) 11059.6,4492.55 ccw(c11059.6,4534.94) R7.1@11089.57,4504.97 ; R7.1@11118.34,4480.14 cw(c11148.32,4450.16) 11148.32,4492.55 cw(c11148.32,4534.94) R7.1@11118.34,4504.97 ; 11160.31,4492.55 ccw(c11160.31,4551.34) R9.1@11201.88,4509.77 ; 11183.5,4492.55 cw(c11183.5,4466.56) R9.1@11201.88,4484.94 ; R9.1@11230.65,4484.94 cw(c11249.03,4466.56) 11249.03,4492.55 ; R9.1@11230.65,4509.77 ccw(c11272.22,4551.34) 11272.22,4492.55 ; 11272.62,4492.55 ccw(c11272.62,4551.34) R4.1@11314.19,4509.77 ; 11295.81,4492.55 cw(c11295.81,4466.56) R4.1@11314.19,4484.94 ; R4.1@11316.16,4484.94 cw(c11286.18,4454.96) 11328.57,4454.96 cw(c11370.96,4454.96) R4.1@11340.99,4484.94 ; v1(11447,4329) v1(11431,4345) 11328.57,4447.43 R4.1@11328.57,4497.35 11323.77,4492.55 R7.1@11103.96,4492.55 11028,4492.55
  Top Layer w30: N3.4@11606,4172 11671.98,4237.98 11894.35,4237.98 v2(11910.09,4253.73) cw(c11872.08,4291.75) 11872.08,4237.98
  Bottom Layer w10: v1@10336.05,4500.97 ccw(c10324.1,4512.92) 10341,4512.92 ccw(c10357.9,4512.92) v1@10345.95,4500.97 ; v1@10336.05,4727.05 cw(c10324.1,4715.1) 10341,4715.1 cw(c10357.9,4715.1) v1@10345.95,4727.05 ; v1(10341,4496.02) v1(10341,4732) ; v1(10512,4964) 10524.69,4951.31 C54.1@10605.68,4951.31 ; C54.1@10589.73,4935.36 ccw(c10551.22,4896.84) 10551.22,4951.31 ccw(c10551.22,5005.77) C54.1@10589.73,4967.26 ; C54.1@10596.8,4942.43 ccw(c10575.36,4920.99) 10575.36,4951.31 ccw(c10575.36,4981.63) C54.1@10596.8,4960.19 ; v1@11414.05,4937.95 ccw(c11402.1,4949.9) 11419,4949.9 ccw(c11435.9,4949.9) v1@11423.95,4937.95 ; v1(11419,4933) 11419,4953.36 C33.1@11448.66,4983.02 ; v1@11419,4935.4 cw(c11452.24,4935.4) C33.1@11449.64,4968.53 ; 11419,4946.21 cw(c11451.39,4946.21) C33.1@11448.86,4978.5 ; 11419,4957.03 cw(c11450.54,4957.03) C33.1@11448.08,4988.47
  Bottom Layer w20: C33.1@11451.66,4980.02 C33.1@11454.66,4983.02
  Bottom Layer w30: R2.2@11428.88,4342.88 ccw(c11458.15,4372.15) R2.2@11458.15,4330.76 ; R2.2@11439.48,4330.76 11557.24,4330.76 C11.1@11586,4302 11586,4230.11 11586,4192 N3.4@11606,4172 ; R2.2@11450.09,4320.15 cw(c11475.69,4294.54) 11475.69,4330.76 cw(c11475.69,4366.97) R2.2@11450.09,4341.36 ; 11540.75,4330.76 ccw(c11540.75,4379.75) C11.1@11575.39,4345.11 ; C11.1@11575.39,4258.89 cw(c11549.79,4233.29) 11586,4233.29 ; C11.1@11575.39,4258.89 cw(c11549.79,4233.29) 11586,4233.29 ; C11.1@11575.39,4258.89 cw(c11549.79,4233.29) 11586,4233.29 ; 11586,4233.29 cw(c11622.21,4233.29) C11.1@11596.61,4258.89 ; 11586,4233.29 cw(c11622.21,4233.29) C11.1@11596.61,4258.89 ; 11586,4233.29 cw(c11622.21,4233.29) C11.1@11596.61,4258.89
A: C15.1 N4.12 R3.2 R13.1 V4.K XS3.1 | length 2194.6
  Top Layer w10: XS3.1@10175.87,5693.87 cw(c10127.28,5645.28) 10196,5645.28 cw(c10264.72,5645.28) XS3.1@10216.13,5693.87 ; R3.2@10180.05,5526.69 ccw(c10141.54,5565.2) 10196,5565.2 ccw(c10250.46,5565.2) R3.2@10211.95,5526.69 ; XS3.1@10182.94,5700.94 cw(c10151.42,5669.42) 10196,5669.42 cw(c10240.58,5669.42) XS3.1@10209.06,5700.94 ; R3.2@10187.12,5519.62 ccw(c10165.68,5541.06) 10196,5541.06 ccw(c10226.32,5541.06) R3.2@10204.88,5519.62 ; XS3.1@10196,5712 R3.2@10196,5510.74 10314.74,5510.74 C15.1@10316,5512 ; R3.2@10206.85,5501.86 cw(c10228.29,5480.42) 10228.29,5510.74 cw(c10228.29,5541.06) R3.2@10206.85,5519.62 ; R3.2@10213.92,5494.79 cw(c10252.43,5456.28) 10252.43,5510.74 cw(c10252.43,5565.2) R3.2@10213.92,5526.69 ; 10256.53,5510.74 ccw(c10256.53,5569.5) C15.1@10298.08,5527.95 ; 10262.61,5510.74 cw(c10262.61,5460.58) C15.1@10298.08,5496.05 ; 10280.67,5510.74 ccw(c10280.67,5545.36) C15.1@10305.15,5520.88
  Bottom Layer w10: N4.12@9726,5557 9726,5589.32 9756.55,5619.87 9756.55,5678.93 9791.98,5714.36 9898.28,5714.36 9900.65,5712 10196,5712 10206,5722 R13.1@10206,5802 cw(c10114.58,5802) XS3.1@10176.67,5734.89 ; N4.12@9733,5585 cw(c9760.34,5585) 9741.01,5604.33 ; V4.K@9941.09,5682.46 ccw(c9919.75,5711.76) 9956,5711.76 ; V4.K@9956,5681.53 9956,5711.76 ; V4.K@9970.91,5682.46 cw(c9992.25,5711.76) 9956,5711.76 ; 10122.45,5712 ccw(c10122.45,5787.55) XS3.1@10175.87,5734.13 ; 10132.11,5712 cw(c10132.11,5650.11) XS3.1@10175.87,5693.87 ; 10146.59,5712 ccw(c10146.59,5763.41) XS3.1@10182.94,5727.06 ; 10156.25,5712 cw(c10156.25,5674.25) XS3.1@10182.94,5700.94 ; XS3.1@10183.46,5727.55 ccw(c10135.75,5779.12) R13.1@10206,5779.12 ; R13.1@10190.05,5784.08 cw(c10151.54,5745.57) 10206,5745.57 cw(c10260.46,5745.57) R13.1@10221.95,5784.08 ; XS3.1@10190.25,5720.21 ccw(c10156.91,5756.24) 10206,5756.24 ; R13.1@10197.12,5791.15 cw(c10175.68,5769.71) 10206,5769.71 cw(c10236.32,5769.71) R13.1@10214.88,5791.15 ; 10206,5758.58 ccw(c10240.58,5758.58) XS3.1@10216.13,5734.13
AV+: C34.1 C36.1 R26.2 U1.6 | length 1100.2
  Top Layer w10: R26.2@8646,4967 cw(c8646,4942.86) 8663.07,4959.93 cw(c8680.14,4977) R26.2@8656,4977 ; v2(8646,4977) 8739.43,4883.57 U1.6@9296,4883.57 ; R26.2@8671,4977 ccw(c8731.36,4977) 8688.68,4934.32 ; R26.2@8681,4977 ccw(c8765.5,4977) 8705.75,4917.25 ; R26.2@8691,4977 ccw(c8799.64,4977) 8722.82,4900.18
  Bottom Layer w10: C36.1@8506,4982 8641,4982 v2(8646,4977) ; 8609.79,4982 cw(c8609.79,4940.79) C34.1@8638.93,4969.93
B: C16.1 N4.13 R13.2 R14.1 V2.K XS3.2 | length 2465
  Top Layer w10: XS3.2@10277.39,5689.92 cw(c10248.07,5652) 10296,5652 ; XS3.2@10283.5,5697.83 cw(c10263.82,5672.37) 10296,5672.37 cw(c10328.18,5672.37) XS3.2@10308.5,5697.83 ; XS3.2@10296,5712 10296,5652 ; XS3.2@10314.61,5689.92 ccw(c10343.93,5652) 10296,5652 ; 10394.13,5553.87 cw(c10352.26,5512) C16.1@10411.47,5512 ; 10398.88,5549.12 ccw(c10434.03,5584.27) C16.1@10434.03,5534.56 ; C16.1@10411.2,5536.8 cw(c10386.4,5512) C16.1@10421.47,5512 ; C16.1@10446.85,5503.12 cw(c10468.29,5481.68) 10468.29,5512 cw(c10468.29,5542.32) C16.1@10446.85,5520.88 ; C16.1@10453.92,5496.05 cw(c10492.43,5457.54) 10492.43,5512 cw(c10492.43,5566.46) C16.1@10453.92,5527.95 ; R14.1@10538.08,5496.05 ccw(c10499.57,5457.54) 10499.57,5512 ccw(c10499.57,5566.46) R14.1@10538.08,5527.95 ; R14.1@10545.15,5503.12 ccw(c10523.71,5481.68) 10523.71,5512 ccw(c10523.71,5542.32) R14.1@10545.15,5520.88 ; R14.1@10556,5512 C16.1@10436,5512 10296,5652
  Bottom Layer w10: N4.13@9773,5585 cw(c9792.35,5585) 9778.67,5598.68 ; N4.13@9776,5557 9776,5596.02 9795.92,5615.94 10029.94,5615.94 10066,5652 10236,5652 XS3.2@10296,5712 ; N4.13@9783,5585 cw(c9826.49,5585) 9795.74,5615.75 ; 10034.94,5620.94 ccw(c10013,5642.88) V2.K@10042.19,5653.41 ; 10039.86,5625.86 cw(c10066,5599.71) V2.K@10066,5636.69 ; V2.K@10046.07,5632.07 ccw(c10029.36,5648.78) V2.K@10051.59,5656.8 ; V2.K@10069.76,5665.76 ccw(c10102.97,5698.97) 10102.97,5652 ccw(c10102.97,5625.03) V2.K@10083.9,5644.1 ; V2.K@10076.83,5672.83 ccw(c10127.12,5723.12) 10127.12,5652 ; V2.K@10083.9,5679.9 ccw(c10151.26,5747.26) 10151.26,5652 ; 10242.63,5658.63 ccw(c10187.27,5714) XS3.2@10265.57,5714 ; 10247.46,5663.46 cw(c10296,5614.92) XS3.2@10296,5683.57 ; 10259.7,5675.7 ccw(c10221.41,5714) XS3.2@10275.57,5714 ; 10264.53,5680.53 cw(c10296,5649.07) XS3.2@10296,5693.57 ; R13.2@10268.79,5784.08 cw(c10230.28,5745.57) 10284.74,5745.57 cw(c10339.2,5745.57) R13.2@10300.69,5784.08 ; XS3.2@10274.48,5735.52 ccw(c10249.71,5760.29) 10284.74,5760.29 ; R13.2@10275.86,5791.15 cw(c10254.42,5769.71) 10284.74,5769.71 cw(c10315.06,5769.71) R13.2@10293.62,5791.15 ; 10284.74,5759.78 ccw(c10333.47,5759.78) XS3.2@10302.61,5722.07 ; R13.2@10284.74,5780.89 ccw(c10350.74,5780.89) XS3.2@10308.94,5729.81 ; XS3.2@10294.74,5713.26 XS3.2@10296,5712 ; XS3.2@10315.27,5737.55 cw(c10368.01,5801.99) R13.2@10284.74,5802 10284.74,5723.26 XS3.2@10296,5712